# Altium PCB PCB1.PcbDoc
Units mm, origin at the board's own origin, x right, y up, seen from the top; angles counter-clockwise.
Board outline 54.61 x 26 mm, 4 copper layers (L1(Signal), L2(GND), L3(GND), L4(Signal)), stack 1.57 mm thick; 35 components, 22 nets, 125 pads, 38 vias.
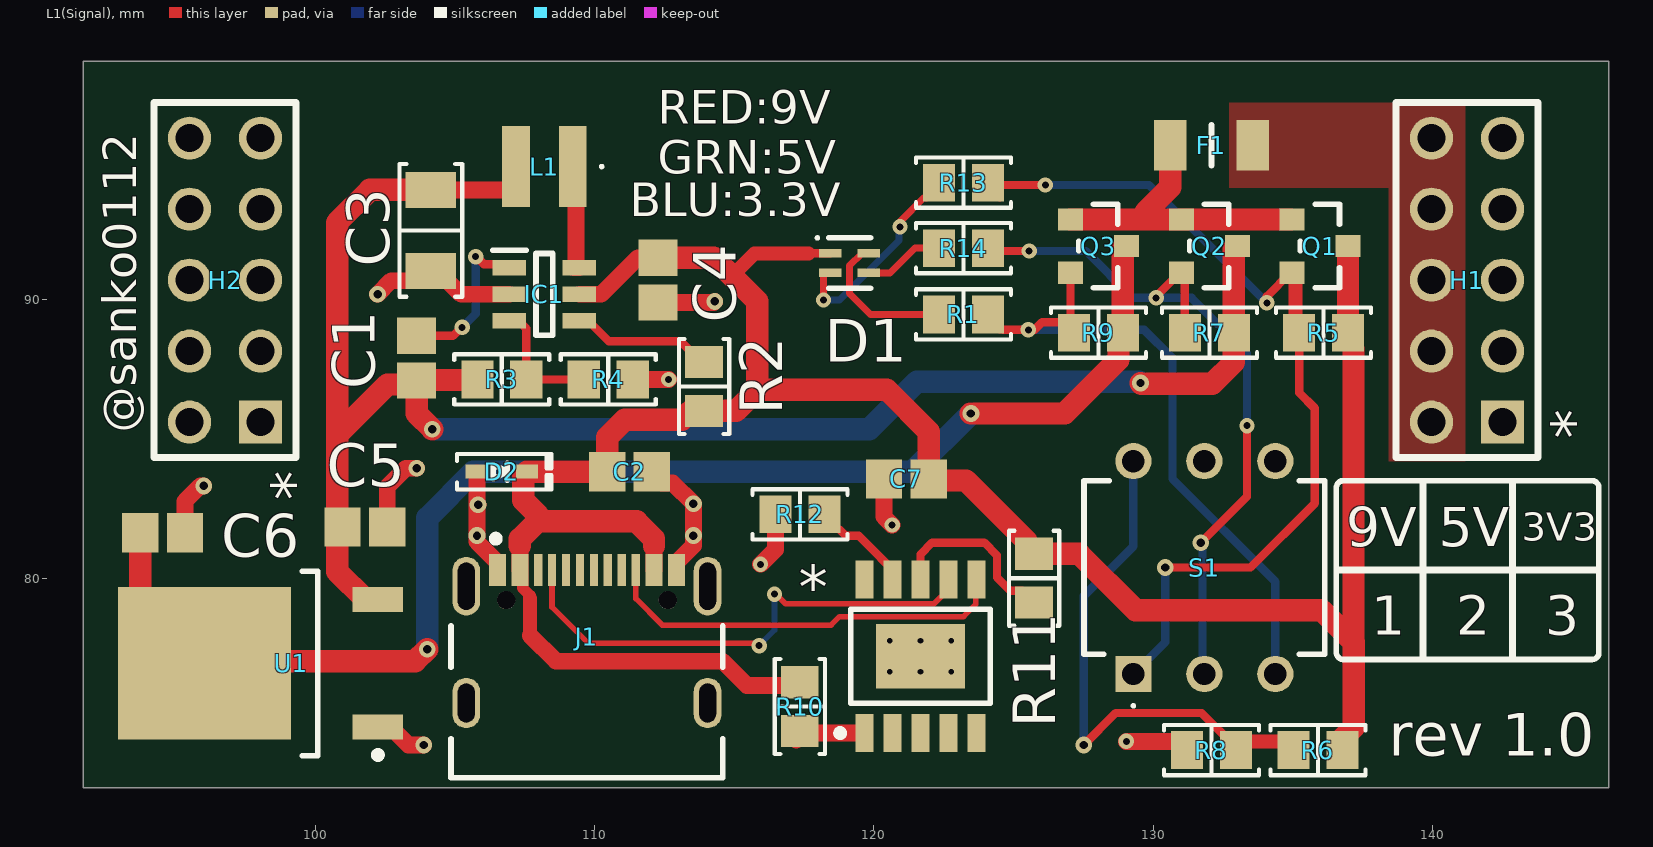
[diagram p0: L1(Signal) view]
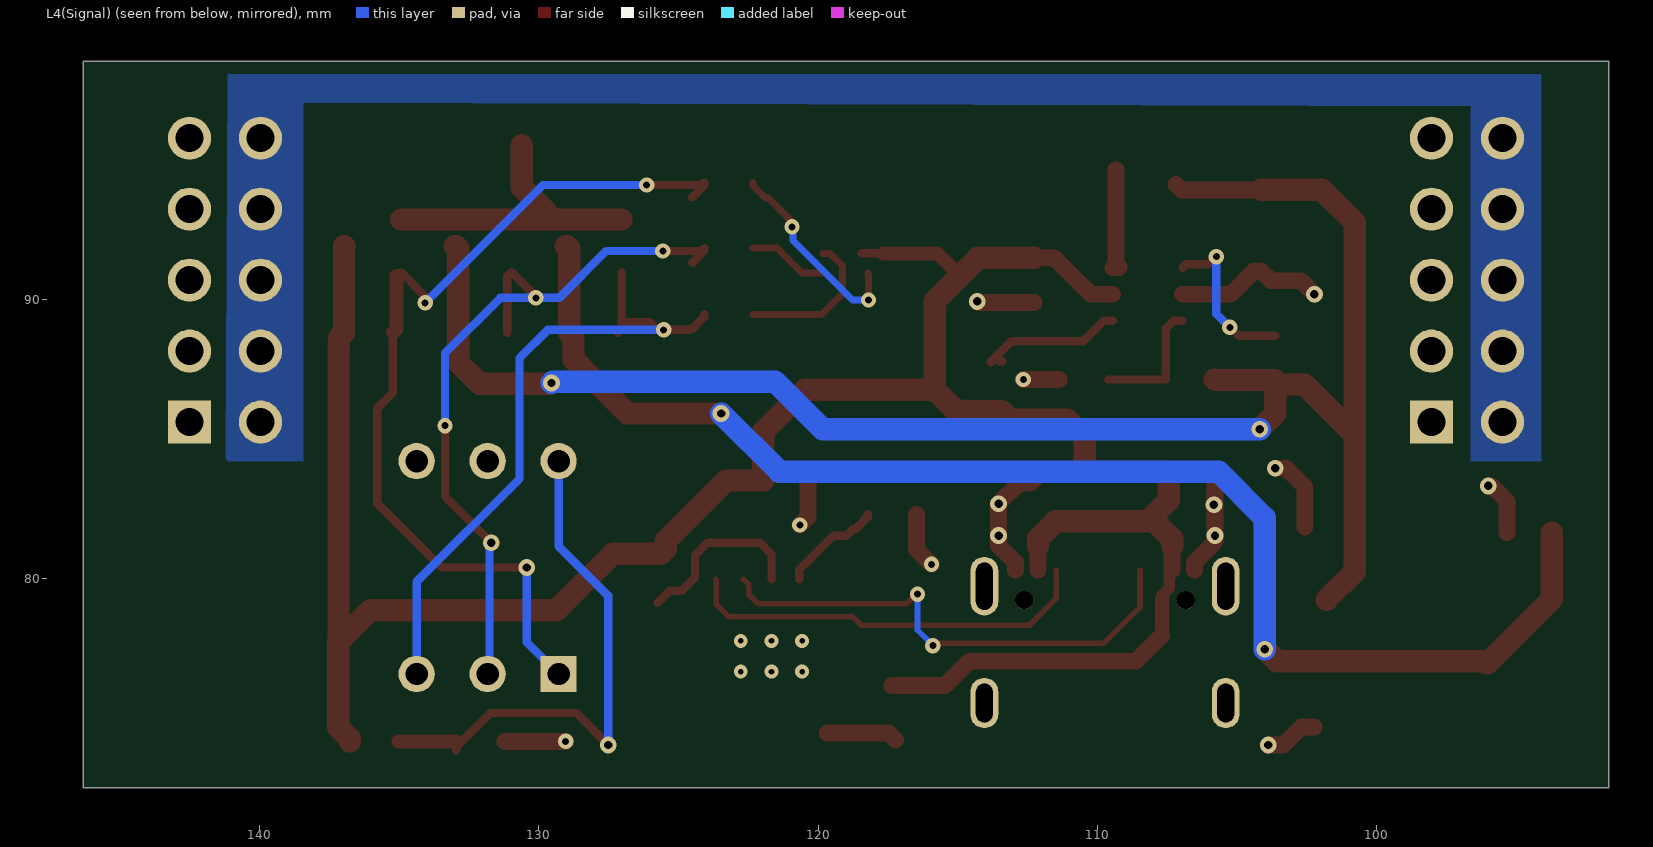
[diagram p1: L4(Signal) view, seen from below]
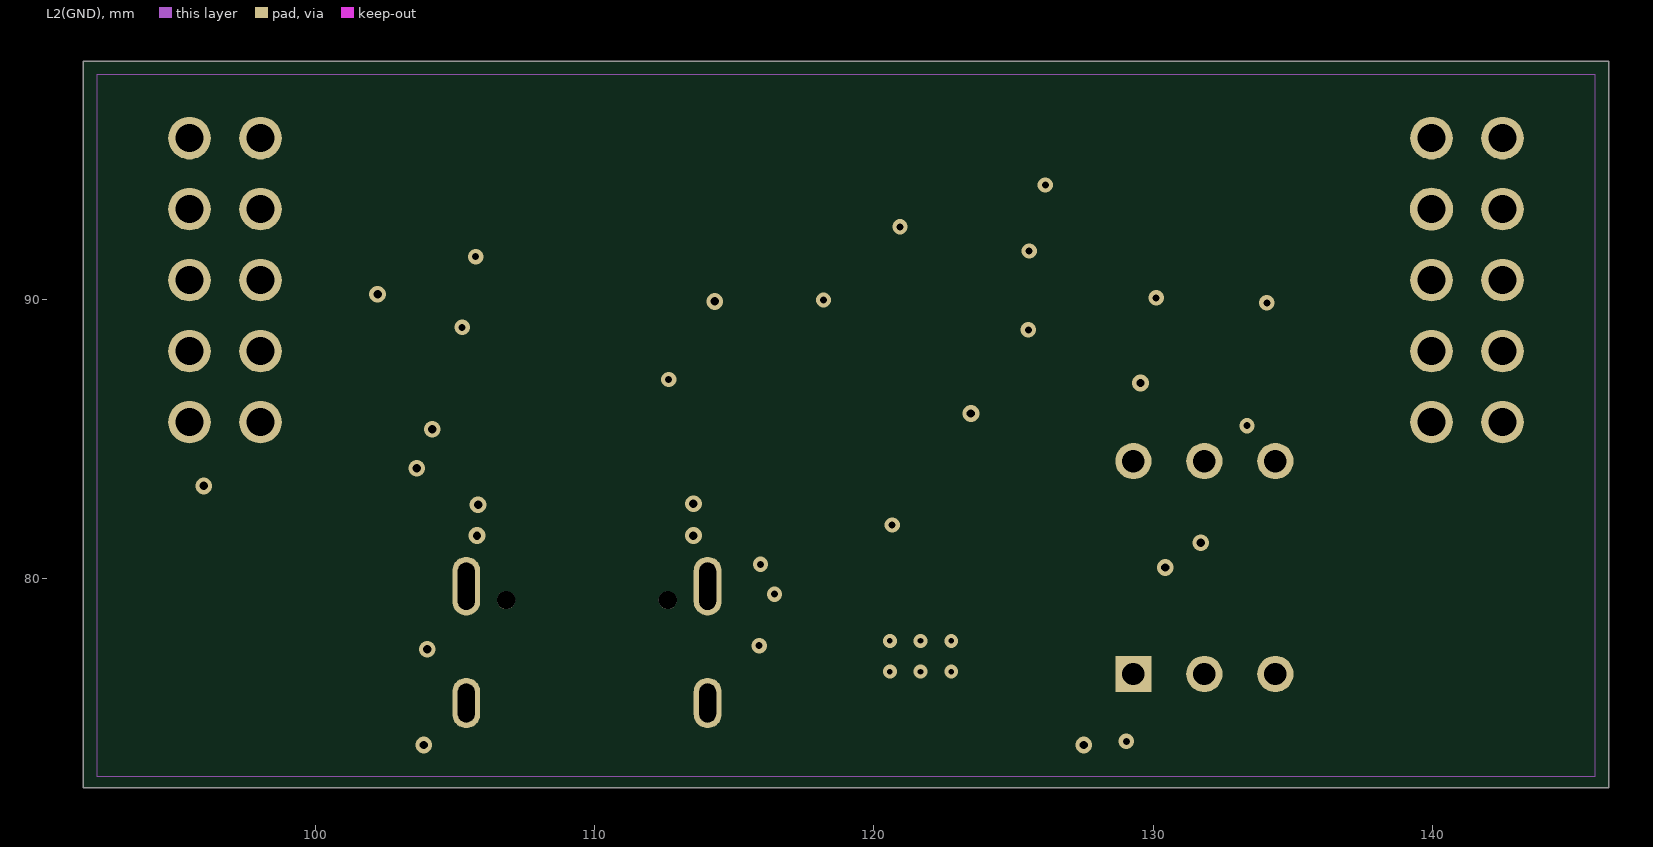
[diagram p2: L2(GND)]
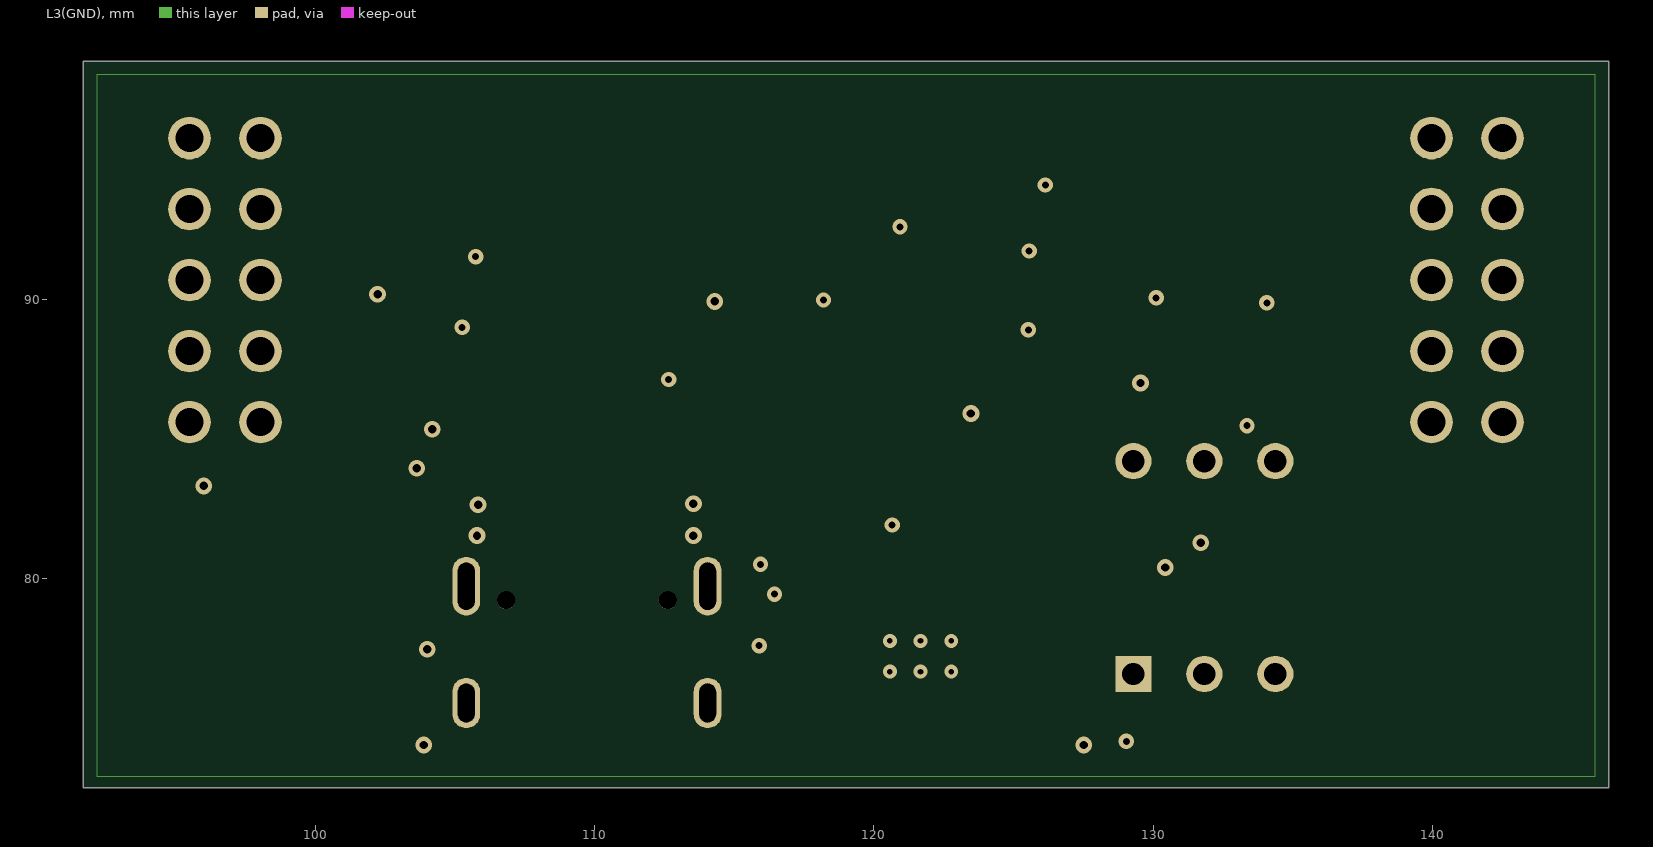
[diagram p3: L3(GND)]
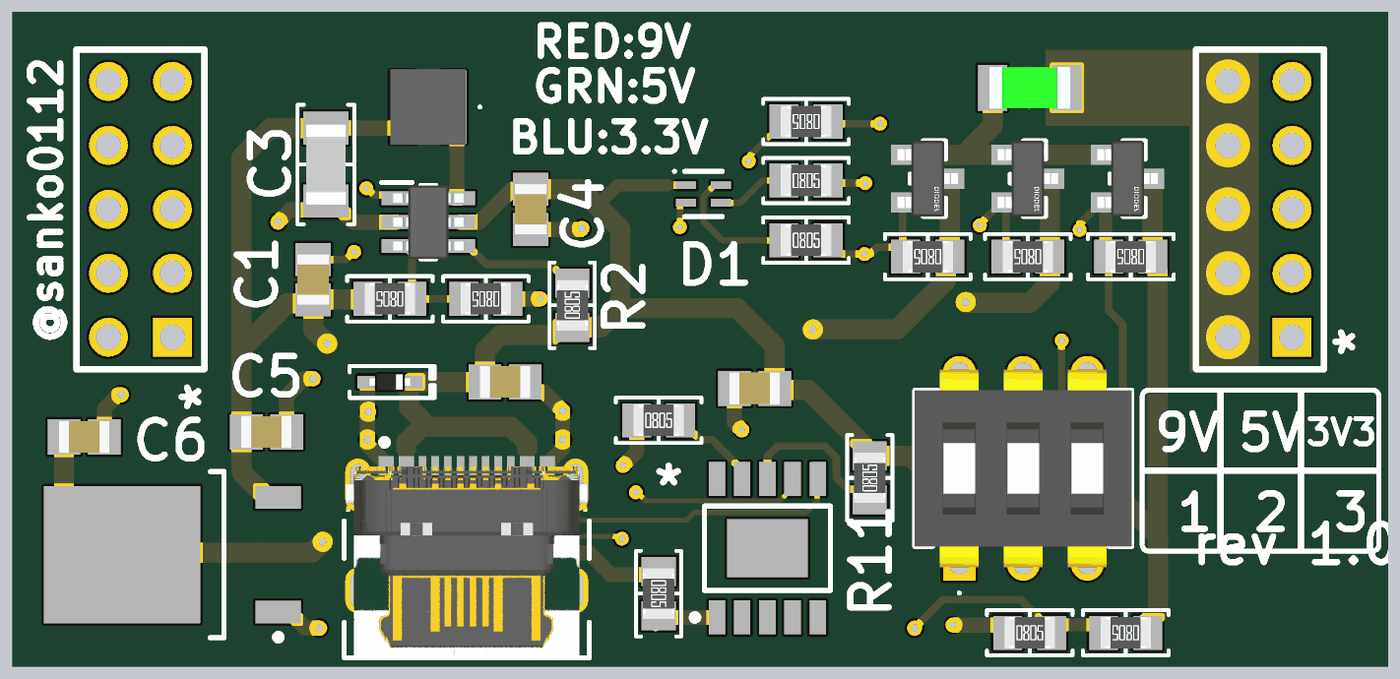
[diagram p4: 3D render of the assembled board from above, using the file's embedded part models]

## Layer stack, top to bottom
Top Mask: solder mask 0.015, Solder Resist, Dk 3.8
L1(Signal): signal copper 0.035
Dielectric 1: prepreg 0.2, 7628, Dk 4.6
L2(GND): signal copper 0.0175
Core: core 1.065, FR-4, Dk 4.5
L3(GND): signal copper 0.0175
Dielectric 2: prepreg 0.2, 7628, Dk 4.6
L4(Signal): signal copper 0.035
Bottom Mask: solder mask 0.015, Solder Resist, Dk 3.8

## Board outline
91.694,72.517 91.694,98.517 146.304,98.517 146.304,72.517

## Design rules (kind name [scope] priority, off if disabled: settings)
BoardOutlineClearance [All] p1: gap=0.22 ignorepadtopadclearanceinfootprint=FALSE
Clearance "Clearance Different Nets" [All] p1: gap=0.2 ignorepadtopadclearanceinfootprint=FALSE except(0.1: Arc-Arc Arc-Track Arc-SMDPad Track-Track Track-SMDPad; 0.127: SMDPad-SMDPad SMDPad-Via THPad-Via Via-Via; 0.254: Arc-Via Arc-Text Track-Via Track-Text SMDPad-Text THPad-Text Via-Text Fill-Text Poly-Text Region-Text Text-Text; 0.5: THPad-THPad Via-Hole)
Clearance "Clearance Same Nets" [All] p2: gap=0.2 ignorepadtopadclearanceinfootprint=FALSE except(0.089: SMDPad-SMDPad; 0.1: Arc-SMDPad Track-SMDPad; 0.127: SMDPad-Via THPad-Via; 0.25: Arc-Arc Arc-Track Track-Track; 0.254: Arc-Via Arc-Text Track-Via Track-Text SMDPad-Text THPad-Text Via-Via Via-Text Fill-Text Poly-Text Region-Text Text-Text)
Clearance "Clearance Bottom Layer" [OnLayer('Bottom Layer') vs InNet('No Net')] p3: gap=0.203 ignorepadtopadclearanceinfootprint=TRUE except(0.254: Arc-Text Track-Text SMDPad-Text THPad-Text Via-Text Fill-Text Poly-Text Region-Text Text-Text)
Clearance "Clearance Top Layer" [OnLayer('Top Layer')] p4: gap=0.203 ignorepadtopadclearanceinfootprint=TRUE except(0.254: Arc-Text Track-Text SMDPad-Text THPad-Text Via-Text Fill-Text Poly-Text Region-Text Text-Text)
HoleSize [All] p1: absolutevalues=TRUE maxlimit=6.3 minlimit=0.2 maxpercent=80.000 minpercent=20.000
MinimumAnnularRing [All] p1: minimumring=0.13
MinimumSolderMaskSliver [All] p1: minsoldermaskwidth=0.1
PolygonConnect PolygonConnect_1 [All] p1: connectstyle=Direct reliefconductorwidth=0.508 reliefentries=4 polygonreliefangle="90 Angle" airgapwidth=0.254
RoutingCorners [All] p1: cornerstyle=Round minsetback=2.54 maxsetback=2.54
RoutingVias [All] p1: holewidth=0.22 width=0.35 viastyle="Through Hole" minholewidth=0.2 minwidth=0.3 maxholewidth=1 maxwidth=2
SilkToSilkClearance [All] p1: silktosilkclearance=0.05
SilkToSolderMaskClearance [IsPad] p1: minsilkscreentomaskgap=0.05 clearancetoexposedcopper=TRUE
SolderMaskExpansion [All] p1: expansion=0.102 istentingtop=FALSE
SupplyNets "Schematic Supply Nets_3" [InNet('+3.3V')] p1: voltage=0.000
SupplyNets "Schematic Supply Nets_2" [InNet('+5V')] p2: voltage=0.000
SupplyNets "Schematic Supply Nets_1" [InNet('GND')] p3: voltage=0.000
SupplyNets "Schematic Supply Nets" [InNet('+9V')] p4: voltage=0.000
Width [All] p1: maxlimit=2.54 minlimit=0.1 preferedwidth=0.5 minimp=50.000000 maximp=50.000000 favimp=50.000000
25 further rules are at their usual default settings.

## Components (designator, comment, footprint, x,y, rotation, side; value= is the part's Value field where it differs from the comment)
* "CH224K" SOP100P600X180_HS-11N 121.666,77.216 r90 top
C1 "0.1 µF" "CAP 0805_2012" 103.632,87.884 r270 top
C2 "4.7 µF" "CAP 0805_2012" 111.252,83.82 r180 top
C3 "22 µF" "CAP 1206_3216 - 0.8MM" 104.14,92.456 r90 top
C4 "2.2 µF" "CAP 0805_2012" 112.268,90.678 r90 top
C5 "4.7 µF" "CAP 0805_2012" 101.778,81.839 r180 top
C6 "4.7 µF" "CAP 0805_2012" 94.539,81.636 r0 top
C7 "1 µF" "CAP 0805_2012" 121.158,83.566 r0 top
D1 "CLMUD-FKC-CH1NP1561BB7T4S3" SON70P150X100-4N 119.126,91.288 r0 top
D2 "PESD5V0S1UB,115" SOD523F 106.68,83.82 r0 top
F1 "SMD1206B075TF_16" FUSC3216X170N 132.08,95.504 r0 top
H1 "2x05 2.54 Pin Header" "2x05 2.54 Pin Header Horizontal -Footprint-1"#1 139.954,85.598 r90 top
H2 "2x05 2.54 Pin Header" "2x05 2.54 Pin Header Horizontal -Footprint-1"#2 95.504,85.598 r90 top
IC1 "DCP3601NMR" SOT95P280X125-6N 108.204,90.17 r0 top
J1 "USB4105-GF-A" FP-USB4105-GF-A-MFG 109.728,76.708 r0 top
L1 "XFL3012-153MEC" XFL3012153MEC 108.204,94.742 r180 top
Q1 "DMG2305UX-13" FP-SOT23-MFG 135.963,91.897 r0 top
Q2 "DMG2305UX-13" FP-SOT23-MFG 132.005,91.897 r0 top
Q3 "DMG2305UX-13" FP-SOT23-MFG 128.032,91.897 r0 top
R1 "1 kOhms" "RES 0805_2012" 123.201,89.451 r0 top
R2 "10 k" "RES 0805_2012" 113.919,86.868 r90 top
R3 "73.2k" "RES 0805_2012" 106.68,87.122 r180 top
R4 "15k" "RES 0805_2012" 110.49,87.122 r180 top
R5 "10 k" "RES 0805_2012" 136.093,88.798 r180 top
R6 "10 k" "RES 0805_2012" 135.89,73.858 r180 top
R7 "10 k" "RES 0805_2012" 132.005,88.798 r180 top
R8 "5.1 k" "RES 0805_2012" 132.08,73.858 r0 top
R9 "10 k" "RES 0805_2012" 128.032,88.798 r180 top
R10 "10 k" "RES 0805_2012" 117.348,75.413 r270 top
R11 "1 kOhms" "RES 0805_2012" 125.73,80.01 r90 top
R12 "6.8 kOhms" "RES 0805_2012" 117.348,82.296 r0 top
R13 "1 kOhms" "RES 0805_2012" 123.201,94.165 r180 top
R14 "1 kOhms" "RES 0805_2012" 123.201,91.821 r0 top
S1 "DS04-254-1L-03BK" DS042541L03BK 129.286,76.581 r0 top
U1 "LD1117DT33TR" TO-252_L 98.044,76.962 r180 top

## Footprints (in the part's own frame and the unit in brackets; to place one, negate y for a bottom-side part, rotate by r counter-clockwise, add the part's x,y. Pads: shape width x height; smd on the part's side, far side on the other; paste and mask are expansions set on the pad)
"2x05 2.54 Pin Header Horizontal -Footprint-1"#1 [mm]
  rect 1.54x1.54 / inner round 1.524 / far side rect 1.54x1.54 hole 1: 1(0,-2.54)
  round 1.54 / inner round 1.524 / far side round 1.54 hole 1: 2(2.54,-2.54) 3(5.08,-2.54) 4(7.62,-2.54) 5(10.16,-2.54) 6(10.16,0) 8(5.08,0) 9(2.54,0) 10(0,0)
  round 1.54 hole 1: 7(7.62,0)
  silkscreen extent -1.27,-3.81 11.43,1.27
"2x05 2.54 Pin Header Horizontal -Footprint-1"#2 [mm]
  rect 1.54x1.54 / inner round 1.524 / far side rect 1.54x1.54 hole 1: 1(0,-2.54)
  round 1.54 / inner round 1.524 / far side round 1.54 hole 1: 2(2.54,-2.54) 3(5.08,-2.54) 4(7.62,-2.54) 5(10.16,-2.54) 6(10.16,0) 7(7.62,0) 8(5.08,0) 9(2.54,0) 10(0,0)
  silkscreen extent -1.27,-3.81 11.43,1.27
"CAP 0805_2012" [mm] "Chip Capacitor, 2-Leads, Body 2.00x1.20mm, IPC Medium Density"
  rect 1.3x1.4 smd: 1(-0.8,0) 2(0.8,0)
  body extent -1,-0.64 1,0.64, height 1.26
"CAP 1206_3216 - 0.8MM" [mm] "Chip Capacitor, 2-Leads, Body 3.25x1.60mm, IPC Medium Density"
  rect 1.3x1.8 smd: 1(-1.45,0) 2(1.45,0)
  silkscreen extent -2.37,-1.12 2.37,1.12, body extent -1.6,-0.8 1.6,0.8, height 0.8
DS042541L03BK [mm]
  rect 1.3x1.3 hole 0.8: 1(0,0)
  round 1.3 hole 0.8: 2(2.54,0) 3(5.08,0) 4(5.08,7.62) 5(2.54,7.62) 6(0,7.62)
  silkscreen extent -1.77,-1.19 6.85,6.91, body extent -1.77,-0.13 6.85,7.74, height 4.49
FP-SOT23-MFG [mm]
  rect 0.9x0.8 smd paste+0 mask+0: 1(-1,0.95) 2(-1,-0.95) 3(1,0)
  silkscreen extent -0.7,-1.5 0.7,1.5, body extent -1.55,-1.6 1.55,1.6, height 0.25
FP-USB4105-GF-A-MFG [mm]
  rrect100% 1x2.1 hole 1.7 slot 0.6 at 0 deg paste-2539.97 mask+0: 1(-4.32,3.015) 2(4.32,3.015)
  rrect100% 1x1.8 hole 1.4 slot 0.6 at 0 deg paste-2539.97 mask+0: 3(-4.32,-1.165) 4(4.32,-1.165)
  rect 0.6x1.15 smd paste+0 mask+0: A1-B12(-3.2,3.59) A4-B9(-2.4,3.59) B1-A12(3.2,3.59) B4-A9(2.4,3.59)
  rect 0.3x1.15 smd paste+0 mask+0: A5(-1.25,3.59) A6(-0.25,3.59) A7(0.25,3.59) A8(1.25,3.59) B5(1.75,3.59) B6(0.75,3.59) B7(-0.75,3.59) B8(-1.75,3.59)
  round 0.65 hole 0.65 unplated paste-2539.97 mask+0: ""(-2.89,2.515) ""(2.89,2.515)
  silkscreen extent -4.86,-3.84 4.86,4.84, body extent -4.96,-3.94 4.96,4.27, height 0.25
FUSC3216X170N [mm]
  rect 1.16x1.82 smd: 1(-1.475,0) 2(1.475,0)
  silkscreen extent 0,-0.73 0,0.73, body extent -1.6,-0.82 1.6,0.82, height 1.7
"RES 0805_2012" [mm] "Chip Resistor, 2-Leads, Body 2.00x1.25mm, IPC Medium Density"
  rect 1.15x1.35 smd: 1(-0.875,0) 2(0.875,0)
  silkscreen extent -1.7,-0.9 1.7,0.9, body extent -1,-0.62 1,0.63, height 0.6
SOD523F [mm] "SODFL, 2-Leads, Body 0.80x1.60mm, IPC Medium Density"
  rect 0.8x0.5 smd: 1(-0.9,0) 2(0.9,0)
  silkscreen extent -1.6,-0.64 1.8,0.64, body extent -0.8,-0.4 0.8,0.4, height 0.65
SON70P150X100-4N [mm] "SON, 4-Leads, Body 1.50x1.50mm, Pitch 0.70mm, IPC Medium Density"
  rect 0.8x0.3 smd: 1(-0.69,0.35) 2(-0.69,-0.35) 3(0.69,-0.35) 4(0.69,0.35)
  silkscreen extent -1.2,-0.9 0.75,0.95, body extent -0.75,-0.75 0.75,0.75, height 1
SOP100P600X180_HS-11N [mm] "SOP, 10-Leads, Body 5.00x3.90mm, Pitch 1.00mm, Thermal Pad 3.20x2.30mm, IPC Medium Density"
  rect 2.3x3.2 smd: 0(0,0)
  rect 1.35x0.65 smd: 1(-2.75,2) 2(-2.75,1) 3(-2.75,0) 4(-2.75,-1) 5(-2.75,-2) 6(2.75,-2) 7(2.75,-1) 8(2.75,0) 9(2.75,1) 10(2.75,2)
  silkscreen extent -2.87,-2.5 1.67,3, body extent -1.95,-2.5 1.95,2.5, height 1.8
SOT95P280X125-6N [mm]
  rect 1.2x0.55 smd: 1(-1.25,0.95) 2(-1.25,0) 3(-1.25,-0.95) 4(1.25,-0.95) 5(1.25,0) 6(1.25,0.95)
  silkscreen extent -1.85,-1.46 0.3,1.58, body extent -1.4,-1.46 1.4,1.46, height 1.25
TO-252_L [mm] "D-PAK, 4-Leads, Body 6.1x6.5mm, Pitch 2.28mm, Lead Span 9.7mm, IPC High Density"
  rect 1.8x0.9 smd: 1(-4.2,2.28) 3(-4.2,-2.28)
  rect 6.2x5.45 smd: 4(2,0)
  silkscreen extent -4.33,-3.3 -1.5,3.4, body extent -2.05,-3.3 4.15,3.3, height 2.4
XFL3012153MEC [mm]
  rect 1x2.9 smd: 1(-1.015,0) 2(1.015,0)
  silkscreen extent -2.1,-0.05 -2,0.05, body extent -1.5,-1.5 1.5,1.5, height 1.4

## Part data
*: library part CMP-019-00049-3, "CH224 single chip integrates USB PD and other fast charging protocols, supports PD3.0/2.0, BC1.2 and other boost fast charging protocols, automatically"
C1: library part CC0805MRX7R9BB104, "CAP CER 0.1UF 50V X7R 0805", Device Package="0805 (2012 Metric)", manufacturer=Yageo, Operating Temperature="-55°C ~ 125°C", Supplier Part Number 1=311-4351-1-ND, Temperature Coefficient=X7R, Tolerance=±20%, Voltage - Rated=50V, Applications="General Purpose", Capacitance="0.1 µF", componentlink1description=Datasheet, componentlink1url=https://www.yageo.com/upload/media/product/productsearch/datasheet/mlcc/UPY-GPHC_X7R_6.3V-to-50V_18.pdf, componentlink2description="DigiKey Link", componentlink2url=https://www.digikey.com/en/products/detail/yageo/CC0805MRX7R9BB104/5884281, lastupdated="2/9/2024 8:16:09 PM", Lifecycle Status=Active, Minimum Order=1, Mounting Type="Surface Mount, MLCC", Package / Case="0805 (2012 Metric)", packaging=TapeAndReel, Part Number=CC0805MRX7R9BB104, Part Status=Active, partid=2475, price=0.01, series=CC, Size / Dimension="0.079\" L x 0.049\" W (2.00mm x 1.25mm)", Supplier 1=DigiKey, Thickness (Max)="0.037\" (0.95mm)"
C2 C5 C6: library part C0805X475J9RACAUTO, "CAP CER 4.7UF 6.3V X7R 0805", Device Package="0805 (2012 Metric)", manufacturer=KEMET, Operating Temperature="-55°C ~ 125°C", Ratings=AEC-Q200, Supplier Part Number 1=399-15727-1-ND, Temperature Coefficient=X7R, Tolerance=±5%, Voltage - Rated=6.3V, Applications="Automotive, Boardflex Sensitive", Capacitance="4.7 µF", componentlink1description=Datasheet, componentlink1url=https://api.kemet.com/component-edge/download/datasheet/C0805X475J9RACAUTO.pdf, componentlink2description="DigiKey Link", componentlink2url=https://www.digikey.com/en/products/detail/kemet/C0805X475J9RACAUTO/7427557, Features="Soft Termination", lastupdated="2/9/2024 8:16:08 PM", Lifecycle Status=Active, Minimum Order=1, Mounting Type="Surface Mount, MLCC", Package / Case="0805 (2012 Metric)", packaging=TapeAndReel, Part Number=C0805X475J9RACAUTO, Part Status=Active, partid=2889, price=0.20, series="SMD Auto X7R Flex", Size / Dimension="0.079\" L x 0.049\" W (2.00mm x 1.25mm)", Supplier 1=DigiKey, Thickness (Max)="0.057\" (1.45mm)"
C3: library part CL31A226MOCLNNC, "CAP CER 22UF 16V X5R 1206", Device Package="1206 (3216 Metric)", manufacturer="Samsung Electro-Mechanics", Operating Temperature="-55°C ~ 85°C", Supplier Part Number 1=1276-2728-1-ND, Temperature Coefficient=X5R, Tolerance=±20%, Voltage - Rated=16V, Applications="General Purpose", Capacitance="22 µF", componentlink1description=Datasheet, componentlink1url=http://www.samsungsem.com/kr/support/product-search/mlcc/CL31A226MOCLNNC.jsp, componentlink2description="DigiKey Link", componentlink2url=https://www.digikey.com/en/products/detail/samsung-electro-mechanics/CL31A226MOCLNNC/3888386, Features="Low Profile", lastupdated="6/4/2024 7:10:40 PM", Lifecycle Status=Active, Minimum Order=1, Mounting Type="Surface Mount, MLCC", Package / Case="1206 (3216 Metric)", packaging=TapeAndReel, Part Number=CL31A226MOCLNNC, Part Status=Active, partid=19106, price=0.04, series=CL, Size / Dimension="0.126\" L x 0.063\" W (3.20mm x 1.60mm)", Supplier 1=DigiKey, Thickness (Max)="0.037\" (0.95mm)"
C4: library part CL21A225KB9LNNC, "CAP CER 2.2UF 50V X5R 0805", Device Package="0805 (2012 Metric)", manufacturer="Samsung Electro-Mechanics", Operating Temperature="-55°C ~ 85°C", Supplier Part Number 1=1276-2409-1-ND, Temperature Coefficient=X5R, Tolerance=±10%, Voltage - Rated=50V, Applications="General Purpose", Capacitance="2.2 µF", componentlink1description=Datasheet, componentlink1url=http://www.samsungsem.com/kr/support/product-search/mlcc/CL21A225KB9LNNC.jsp, componentlink2description="DigiKey Link", componentlink2url=https://www.digikey.com/en/products/detail/samsung-electro-mechanics/CL21A225KB9LNNC/3888067, Features="Low Profile", lastupdated="2/9/2024 8:16:07 PM", Lifecycle Status=Active, Minimum Order=1, Mounting Type="Surface Mount, MLCC", Package / Case="0805 (2012 Metric)", packaging=TapeAndReel, Part Number=CL21A225KB9LNNC, Part Status=Active, partid=3097, price=0.04, series=CL, Size / Dimension="0.079\" L x 0.049\" W (2.00mm x 1.25mm)", Supplier 1=DigiKey, Thickness (Max)="0.039\" (1.00mm)"
C7: library part C2012X7R1H105K125AE, "CAP CER 1UF 50V X7R 0805", Device Package="0805 (2012 Metric)", manufacturer="TDK Corporation", Operating Temperature="-55°C ~ 125°C", Supplier Part Number 1=445-8890-1-ND, Temperature Coefficient=X7R, Tolerance=±10%, Voltage - Rated=50V, Applications="Boardflex Sensitive", Capacitance="1 µF", componentlink1description=Datasheet, componentlink1url=https://product.tdk.com/info/en/catalog/datasheets/mlcc_commercial_soft_en.pdf?ref_disty=digikey, componentlink2description="DigiKey Link", componentlink2url=https://www.digikey.com/en/products/detail/tdk-corporation/C2012X7R1H105K125AE/3283657, Features="Soft Termination", lastupdated="2/9/2024 8:16:07 PM", Lifecycle Status=Active, Minimum Order=1, Mounting Type="Surface Mount, MLCC", Package / Case="0805 (2012 Metric)", packaging=TapeAndReel, Part Number=C2012X7R1H105K125AE, Part Status=Active, partid=3116, price=0.09, series=C, Size / Dimension="0.080\" L x 0.050\" W (2.03mm x 1.27mm)", Supplier 1=DigiKey, Thickness (Max)="0.059\" (1.50mm)"
D1: library part CMP-007-00044-1, "Cree LED RGB LED Common Annode If=10mA Vf = 1.9/2.6/2.7"
D2: "TVS DIODE 5VWM 20VC SOD523", Capacitance @ Frequency="152pF @ 1MHz", Current - Peak Pulse (10/1000µs)="15A (8/20µs)", manufacturer="Nexperia USA Inc.", Operating Temperature="-65°C ~ 150°C (TA)", Package / Case="SC-79, SOD-523", Power - Peak Pulse=260W, Power Line Protection=No, Supplier Device Package=SOD-523, Supplier Part Number 1=1727-3839-1-ND, Voltage - Breakdown (Min)=6.4V, Voltage - Clamping (Max) @ Ipp=20V, Voltage - Reverse Standoff (Typ)="5V (Max)", Applications="General Purpose", componentlink1description=Datasheet, componentlink1url=https://assets.nexperia.com/documents/data-sheet/PESDXS1UB_SERIES.pdf, componentlink2description="DigiKey Link", componentlink2url=https://www.digikey.com/en/products/detail/nexperia-usa-inc/PESD5V0S1UB-115/1157466, lastupdated="6/3/2024 8:22:18 PM", Lifecycle Status=Active, Minimum Order=1, Mounting Type="Surface Mount", packaging=TapeAndReel, Part Number=PESD5V0S1UB,115, Part Status=Active, partid=9746, price=0.07, series=-, Supplier 1=DigiKey, Type=Zener, Unidirectional Channels=1
F1: "Fuse", Arrow Part Number=SMD1206B075TF/16, Manufacturer_Name=YAGEO, Mouser Part Number=603-SMD1206B075TF/16, Arrow Price/Stock=https://www.arrow.com/en/products/smd1206b075tf16/yageo?utm_currency=USD&region=europe, Datasheet Link=https://www.yageo.com/upload/media/product/productsearch/datasheet/cpc/pptc/SMD1206_1.pdf, Height=1.7mm, Manufacturer_Part_Number=SMD1206B075TF/16, Mouser Price/Stock=https://www.mouser.co.uk/ProductDetail/YAGEO/SMD1206B075TF-16?qs=PzGy0jfpSMs6BxWZGfvz0g%3D%3D
H1 H2: library part CMP-00030-00001-1, "2x05 2.54mm Pin Header Horizontal"
IC1: "Integrated Circuit", Manufacturer_Name=STMicroelectronics, Mouser Part Number=511-DCP3601NMR, Datasheet Link=https://www.st.com/resource/en/datasheet/dcp3601.pdf, Height=1.25mm, Manufacturer_Part_Number=DCP3601NMR, Mouser Price/Stock=https://www.mouser.co.uk/ProductDetail/STMicroelectronics/DCP3601NMR?qs=VVKQmw408U%252BduQkqjRfAvg%3D%3D
J1: library part CMP-002-00071-1, "Conn USB 2.0 Type C RCP 24 POS 0.3mm/0.5mm Solder RA SMD 24 Terminal 1 Port T/R"
L1: "Inductor", Manufacturer_Name=COILCRAFT, Mouser Part Number=994-XFL3012-153MEC, Datasheet Link=https://www.coilcraft.com/en-us/files/datasheet/xfl3012, Height=1.3mm, Manufacturer_Part_Number=XFL3012-153MEC, Mouser Price/Stock=https://www.mouser.co.uk/ProductDetail/Coilcraft/XFL3012-153MEC?qs=zCSbvcPd3pYzlT47BogAHw%3D%3D
Q1 Q2 Q3: library part CMP-013-00034-1, "Power Field-Effect Transistor, 4.2A I(D), 20V, 0.052ohm, 1-Element, P-Channel, Silicon, Metal-oxide Semiconductor FET", Max Operating Temperature=150°C, Pins=3, RoHS Compliant=Yes
R1 R13 R14: library part RNCS0805BKE1K00, "RES 1K OHM 0.1% 1/10W 0805", Device Package="0805 (2012 Metric)", manufacturer="Stackpole Electronics Inc", Operating Temperature="-55°C ~ 155°C", Power (Watts)="0.1W, 1/10W", Ratings=AEC-Q200, Supplier Device Package=0805, Supplier Part Number 1=RNCS0805BKE1K00CT-ND, Temperature Coefficient=±25ppm/°C, Tolerance=±0.1%, componentlink1description=Datasheet, componentlink1url=https://www.seielect.com/catalog/sei-rncs_rnch.pdf, componentlink2description="DigiKey Link", componentlink2url=https://www.digikey.com/en/products/detail/stackpole-electronics-inc/RNCS0805BKE1K00/1800073, Composition="Thin Film", Features="Anti-Corrosive, Automotive AEC-Q200, Moisture Resistant", Height - Seated (Max)="0.026\" (0.65mm)", lastupdated="2/8/2024 9:02:39 PM", Lifecycle Status=Active, Minimum Order=1, Number of Terminations=2, Package / Case="0805 (2012 Metric)", packaging=TapeAndReel, Part Number=RNCS0805BKE1K00, Part Status=Active, partid=27715, price=0.07, Resistance="1 kOhms", series=RNCS, Size / Dimension="0.079\" L x 0.049\" W (2.00mm x 1.25mm)", Supplier 1=DigiKey
R2 R5 R6 R7 R9 R10: library part RNCS0805BKE10K0, "RES 10K OHM 0.1% 1/10W 0805", Device Package="0805 (2012 Metric)", manufacturer="Stackpole Electronics Inc", Operating Temperature="-55°C ~ 155°C", Power (Watts)="0.1W, 1/10W", Ratings=AEC-Q200, Resistance="10 kOhms", Supplier Device Package=0805, Supplier Part Number 1=RNCS0805BKE10K0CT-ND, Temperature Coefficient=±25ppm/°C, Tolerance=±0.1%, componentlink1description=Datasheet, componentlink1url=https://www.seielect.com/catalog/sei-rncs_rnch.pdf, componentlink2description="DigiKey Link", componentlink2url=https://www.digikey.com/en/products/detail/stackpole-electronics-inc/RNCS0805BKE10K0/1800067, Composition="Thin Film", Features="Anti-Corrosive, Automotive AEC-Q200, Moisture Resistant", Height - Seated (Max)="0.026\" (0.65mm)", lastupdated="2/8/2024 9:02:39 PM", Lifecycle Status=Active, Minimum Order=1, Number of Terminations=2, Package / Case="0805 (2012 Metric)", packaging=TapeAndReel, Part Number=RNCS0805BKE10K0, Part Status=Active, partid=27713, price=0.07, series=RNCS, Size / Dimension="0.079\" L x 0.049\" W (2.00mm x 1.25mm)", Supplier 1=DigiKey
R3: library part CRCW080573K2FKEA, "RES SMD 73.2K OHM 1% 1/8W 0805", Device Package="0805 (2012 Metric)", manufacturer="Vishay Dale", Operating Temperature="-55°C ~ 155°C", Power (Watts)="0.125W, 1/8W", Ratings=AEC-Q200, Resistance="73.2 kOhms", Supplier Device Package=0805, Supplier Part Number 1=541-73.2KCCT-ND, Temperature Coefficient=±100ppm/°C, Tolerance=±1%, componentlink1description=Datasheet, componentlink1url=http://www.vishay.com/docs/20035/dcrcwe3.pdf, componentlink2description="DigiKey Link", componentlink2url=https://www.digikey.com/en/products/detail/vishay-dale/CRCW080573K2FKEA/1175850, Composition="Thick Film", Features="Automotive AEC-Q200", Height - Seated (Max)="0.020\" (0.50mm)", lastupdated="2/8/2024 9:02:35 PM", Lifecycle Status=Active, Minimum Order=1, Number of Terminations=2, Package / Case="0805 (2012 Metric)", packaging=TapeAndReel, Part Number=CRCW080573K2FKEA, Part Status=Active, partid=28591, price=0.01, series=CRCW, Size / Dimension="0.079\" L x 0.049\" W (2.00mm x 1.25mm)", Supplier 1=DigiKey
R4: library part CRGP0805F15K, "RES 15K OHM 1% 1/3W 0805", Device Package="0805 (2012 Metric)", manufacturer="TE Connectivity Passive Product", Operating Temperature="-55°C ~ 155°C", Power (Watts)="0.333W, 1/3W", Resistance="15 kOhms", Supplier Device Package=0805, Supplier Part Number 1=A130491CT-ND, Temperature Coefficient=±100ppm/°C, Tolerance=±1%, componentlink1description=Datasheet, componentlink1url=https://www.te.com/commerce/DocumentDelivery/DDEController?Action=srchrtrv&DocNm=9-1773463-9&DocType=DS&DocLang=English, componentlink2description="DigiKey Link", componentlink2url=https://www.digikey.com/en/products/detail/te-connectivity-passive-product/CRGP0805F15K/8577093, Composition="Thick Film", Features="Pulse Withstanding", Height - Seated (Max)="0.026\" (0.65mm)", lastupdated="2/8/2024 9:02:34 PM", Lifecycle Status=Active, Minimum Order=1, Number of Terminations=2, Package / Case="0805 (2012 Metric)", packaging=TapeAndReel, Part Number=CRGP0805F15K, Part Status=Active, partid=28775, price=0.02, series=CRGP, Size / Dimension="0.079\" L x 0.049\" W (2.00mm x 1.25mm)", Supplier 1=DigiKey
R8: library part RTAN0805BKE5K10, "RES 5.1K OHM 0.1% 1/5W 0805", Device Package="0805 (2012 Metric)", manufacturer="Stackpole Electronics Inc", Operating Temperature="-55°C ~ 155°C", Power (Watts)="0.2W, 1/5W", Ratings=AEC-Q200, Resistance="5.1 kOhms", Supplier Device Package=0805, Supplier Part Number 1=738-RTAN0805BKE5K10CT-ND, Temperature Coefficient=±25ppm/°C, Tolerance=±0.1%, componentlink1description=Datasheet, componentlink1url=https://www.seielect.com/catalog/sei-rtan.pdf, componentlink2description="DigiKey Link", componentlink2url=https://www.digikey.com/en/products/detail/stackpole-electronics-inc/RTAN0805BKE5K10/6602187, Composition="Thin Film", Features="Anti-Sulfur, Automotive AEC-Q200, Moisture Resistant", Height - Seated (Max)="0.026\" (0.65mm)", lastupdated="2/8/2024 9:02:20 PM", Lifecycle Status=Active, Minimum Order=1, Number of Terminations=2, Package / Case="0805 (2012 Metric)", packaging=TapeAndReel, Part Number=RTAN0805BKE5K10, Part Status=Active, partid=31948, price=0.15, series=RTAN, Size / Dimension="0.079\" L x 0.049\" W (2.00mm x 1.25mm)", Supplier 1=DigiKey
R11: library part CPF0805B1K0E, "RES SMD 1K OHM 0.1% 1/10W 0805", Device Package="0805 (2012 Metric)", manufacturer="TE Connectivity Passive Product", Operating Temperature="-55°C ~ 155°C", Power (Watts)="0.1W, 1/10W", Supplier Device Package=0805, Supplier Part Number 1=A106044CT-ND, Temperature Coefficient=±25ppm/°C, Tolerance=±0.1%, componentlink1description=Datasheet, componentlink1url=https://www.te.com/commerce/DocumentDelivery/DDEController?Action=srchrtrv&DocNm=1773200&DocType=DS&DocLang=English, componentlink2description="DigiKey Link", componentlink2url=https://www.digikey.com/en/products/detail/te-connectivity-passive-product/CPF0805B1K0E/2390399, Composition="Thin Film", Height - Seated (Max)="0.026\" (0.65mm)", lastupdated="2/8/2024 9:02:39 PM", Lifecycle Status=Active, Minimum Order=1, Number of Terminations=2, Package / Case="0805 (2012 Metric)", packaging=TapeAndReel, Part Number=CPF0805B1K0E, Part Status=Active, partid=27725, price=0.09, Resistance="1 kOhms", series="CPF, Neohm", Size / Dimension="0.079\" L x 0.049\" W (2.00mm x 1.25mm)", Supplier 1=DigiKey
R12: library part CR0805-JW-682ELF, "RES SMD 6.8K OHM 5% 1/8W 0805", Device Package="0805 (2012 Metric)", manufacturer="Bourns Inc.", Operating Temperature="-55°C ~ 155°C", Power (Watts)="0.125W, 1/8W", Supplier Device Package=0805, Supplier Part Number 1=118-CR0805-JW-682ELFCT-ND, Temperature Coefficient=±200ppm/°C, Tolerance=±5%, componentlink1description=Datasheet, componentlink1url=https://www.bourns.com/docs/Product-Datasheets/CHPREZTR.pdf, componentlink2description="DigiKey Link", componentlink2url=https://www.digikey.com/en/products/detail/bourns-inc/CR0805-JW-682ELF/3785357, Composition="Thick Film", Features="Moisture Resistant", Height - Seated (Max)="0.024\" (0.60mm)", lastupdated="2/8/2024 9:02:38 PM", Lifecycle Status=Active, Minimum Order=1, Number of Terminations=2, Package / Case="0805 (2012 Metric)", packaging=TapeAndReel, Part Number=CR0805-JW-682ELF, Part Status=Active, partid=27886, price=0.01, Resistance="6.8 kOhms", series=CR0805, Size / Dimension="0.079\" L x 0.049\" W (2.00mm x 1.25mm)", Supplier 1=DigiKey
S1: "Switch", Manufacturer_Name="Same Sky", Mouser Part Number=490-DS04-254-1L-03BK, Datasheet Link=https://www.sameskydevices.com/product/resource/ds04-254.pdf, Height=4.51mm, Manufacturer_Part_Number=DS04-254-1L-03BK, Mouser Price/Stock=https://www.mouser.co.uk/ProductDetail/CUI-Devices/DS04-254-1L-03BK?qs=wnTfsH77Xs7MGlxBqw7mAg%3D%3D
U1: library part CMP-019-00053-1, "Fixed Positive LDO Regulator, 3.3V, 1.2V Dropout, BIPolar, PSSO2", Case/Package=TO-252, Max Supply Voltage=15V, Pins=2, RoHS Compliant=Yes

## Via types
v1: diameter 0.55, hole 0.25, L1(Signal) to L4(Signal), 16 vias
v2: diameter 0.6, hole 0.3, L1(Signal) to L4(Signal), 16 vias
v3: diameter 0.5, hole 0.2, L1(Signal) to L4(Signal), 6 vias

## Nets (pads, with @x,y where several pads share a name; then routed paths per layer and width w, separated by ;. In a path a pad name is that pad's centre, name@x,y a point inside that pad or via, vN(x,y) a via of type N, cw(c..) or ccw(c..) an arc to the next point about the centre after c; other vN are vias at no path point)
+3.3V: C6.1 Q3.3 R9.1 U1.4 | length 49.7
  L1(Signal) w0.8: C6.1 93.739,79.267 U1.4 ; U1.4@96.12,77.038 103.581,77.038 v2(104.013,77.47) ; v2(123.469,85.903) 126.822,85.903 128.753,87.833 128.753,88.644 R9.1 128.907,91.822 128.982,91.897 Q3.3
  L4(Signal) w0.8: v2(104.013,77.47) 104.013,82.169 105.664,83.82 121.387,83.82 v2(123.469,85.903)
+5V: C1.2 C3.2 C5.2 L1.2 Q2.3 R3.2 R7.1 U1.3 | length 62.7
  L1(Signal) w0.6: C3.2 106.989,93.906 L1.2@107.189,94.106
  L1(Signal) w0.8: U1.3@101.794,79.242 100.787,80.249 100.787,81.839 100.787,85.141 ; C3.2 101.958,93.906 100.787,92.735 100.787,85.141 ; v2(104.191,85.344) 103.632,85.903 C1.2 ; R3.2 105.786,87.103 103.651,87.103 C1.2 ; v2(129.54,86.995) 129.565,86.97 132.112,86.97 132.88,87.737 R7.1 132.88,91.822 132.955,91.897 Q2.3 ; 100.787,85.141 102.59,86.943 103.491,86.943 C1.2
  L4(Signal) w0.8: v2(104.191,85.344) 119.837,85.344 121.539,87.046 129.489,87.046 v2(129.54,86.995)
+9V: C2.2 C4.2 C7.2 D1.1 D2.2 IC1.5 J1.A4-B9 J1.B4-A9 Q1.3 R2.1 R5.1 R6.1 R10.1 R11.2 | length 91.3
  L1(Signal) w0.3: 117.8,91.638 D1.1
  L1(Signal) w0.4: J1.A4-B9 107.428,80.198 107.428,79.658 107.696,79.39 107.696,79.286
  L1(Signal) w0.5: 107.696,77.956 107.696,79.286 ; 114.916,90.824 115.73,91.638 117.658,91.638
  L1(Signal) w0.6: J1.A4-B9 107.328,81.166 ; 107.696,77.956 108.614,77.038 114.579,77.038 115.452,76.165 R10.1@117.353,76.165 ; IC1.5 110.236,90.17 111.544,91.478 C4.2 ; J1.B4-A9 112.128,81.166
  L1(Signal) w0.8: 107.328,81.166 107.328,81.42 107.95,82.042 ; 112.128,81.166 112.128,81.42 111.506,82.042 107.95,82.042 ; C4.2 114.262,91.478 114.916,90.824 115.824,89.916 115.824,86.755 ; C7.2 121.958,85.255 120.458,86.755 115.824,86.755 ; C7.2@121.966,83.508 123.293,83.508 125.455,81.346 125.455,81.06 R11.2@125.63,80.885 ; R11.2@125.83,80.885 R11.2 127.344,80.885 129.362,78.867 136.017,78.867 137.16,77.724 137.16,88.216 137.143,88.233 137.143,88.623 R5.1 136.968,91.897 Q1.3 ; R6.1@136.765,74.168 136.765,74.268 137.174,74.677 137.174,77.724 ; 107.95,82.042 107.95,82.296 107.442,82.804 107.442,83.682 D2.2 C2.2 110.452,85.052 111.083,85.683 113.128,85.683 113.438,85.993 R2.1 114.695,85.993 114.704,86.002 114.713,85.993 115.062,85.993 115.824,86.755
Blue_C: Q3.2 R1.2 R9.2 S1.3 | length 24.5
  L1(Signal) w0.3: R1.2 124.076,89.351 124.501,88.926 124.601,88.926 124.627,88.9 v1(125.523,88.9) 125.749,88.9 126.022,89.173 126.783,89.173 R9.2@127.032,88.923 ; Q3.2 R9.2@127.032,88.923 ; R9.2 R9.2@127.032,88.923
  L4(Signal) w0.3: v1(125.523,88.9) 129.667,88.9 130.683,87.884 130.683,83.566 134.366,79.883 S1.3@134.366,76.129
CC1: *.7 J1.A5 | length 18.3
  L1(Signal) w0.2: J1.A5 108.478,78.974 109.767,77.685 115.661,77.685 115.71,77.636 115.851,77.636 v1(115.89,77.597) ; v1(116.441,79.437) 116.495,79.437 116.841,79.091 122.141,79.091 122.485,79.435 122.485,79.785 *.7
  L4(Signal) w0.2: v1(115.89,77.597) 116.441,78.149 v1(116.441,79.437)
CC2: *.6 J1.B5 | length 14.8
  L1(Signal) w0.2: J1.B5 111.478,79.276 112.422,78.332 118.464,78.332 118.769,78.637 123.203,78.637 123.64,79.073 123.64,79.94 *.6
GND: *.0 C2.1 C3.1 C4.1 C5.1 C6.2 C7.1 D2.1 H1.1 H1.2 H1.3 H1.4 H1.5 H2.1 H2.2 H2.3 H2.4 H2.5 IC1.2 J1.1 J1.2 J1.3 J1.4 J1.A1-B12 J1.B1-A12 R4.1 R8.1 R12.1 S1.4 S1.5 U1.1 | length 29.6
  L1(Signal) w0.6: C6.2 95.339,82.766 95.885,83.312 v2(96.012,83.312) ; v2(102.235,90.17) 102.721,90.656 103.79,90.656 C3.1 ; U1.1@102.25,74.676 U1.1 102.694,74.682 103.335,74.041 v2(103.886,74.041) ; C5.1 102.578,83.274 103.251,83.947 v2(103.632,83.947) ; C3.1@104.39,91.006 105.226,90.17 IC1.2 ; D2.1@105.791,83.77 105.791,82.677 v2(105.831,82.637) 105.791,82.598 105.791,81.31 106.528,80.573 J1.A1-B12 ; R4.1 v1(112.649,87.122) ; C2.1 112.052,83.77 112.402,83.42 112.795,83.42 v2(113.538,82.677) 113.538,81.183 112.928,80.573 J1.B1-A12 ; C4.1 114.262,89.878 v2(114.3,89.916) ; v1(115.94,80.507) 116.473,81.04 R12.1 ; C7.1 120.358,82.207 v1(120.65,81.915) ; v1(129.032,74.168) R8.1@131.205,74.168
  other v2: 105.791,81.534 113.538,81.534
  other v3: 120.566,76.666 121.666,76.666 122.766,76.666 120.566,77.766 121.666,77.766 122.766,77.766
GREEN_C: Q2.2 R7.2 R14.2 S1.2 | length 26.9
  L1(Signal) w0.3: R14.2 124.076,91.721 R14.2@124.501,91.296 ; R14.2@124.078,91.719 v1(125.552,91.719) ; v1(130.099,90.041) 130.118,90.06 130.118,90.11 130.955,90.947 Q2.2 ; R7.2 Q2.2@131.13,90.822 ; v2(131.699,81.28) 133.35,82.931 v1(133.35,85.471)
  L4(Signal) w0.3: v1(125.552,91.719) 127.584,91.719 129.262,90.041 v1(130.099,90.041) 131.37,90.041 133.35,88.062 v1(133.35,85.471) ; v2(131.699,81.28) 131.756,81.223 S1.2@131.756,76.651
Net*_1: *.1 R10.2 | length 2.5
  L1(Signal) w0.6: R10.2@117.221,74.221 117.466,74.466 *.1
Net*_8: *.8 R11.1 | length 6.5
  L1(Signal) w0.3: *.8 121.666,80.865 122.081,81.28 123.952,81.28 124.404,80.828 124.404,80.033 124.883,79.554 125.311,79.554 R11.1
Net*_9: *.9 R12.2 | length 4.4
  L1(Signal) w0.3: R12.2@118.648,81.788 118.223,82.213 R12.2 118.223,82.196 118.648,81.771 118.748,81.771 118.985,81.534 119.452,81.534 120.241,80.745 120.241,80.741 120.666,80.316 *.9
NetC1_1: C1.1 IC1.1 | length 5.9
  L1(Signal) w0.3: C1.1 104.929,88.684 105.232,88.987 v1(105.259,88.987) ; v1(105.743,91.515) 105.77,91.515 106.039,91.245 106.829,91.245 IC1.1
  L4(Signal) w0.3: v1(105.259,88.987) 105.743,89.47 v1(105.743,91.515)
NetD1_2: D1.2 R13.2 | length 7.3
  L1(Signal) w0.25: v1(118.191,89.967) 118.191,90.913 D1.2@118.216,90.938 ; v1(120.929,92.583) 120.958,92.612 120.958,92.797 121.776,93.615 121.876,93.615 122.326,94.065 R13.2
  L4(Signal) w0.25: v1(118.191,89.967) 118.77,89.967 120.901,92.097 120.901,92.554 v1(120.929,92.583)
NetD1_3: D1.3 R14.1 | length 2.9
  L1(Signal) w0.25: D1.3 120.579,90.938 121.463,91.821 R14.1
NetD1_4: D1.4 R1.1 | length 5.4
  L1(Signal) w0.25: D1.4 119.566,91.638 119.126,91.198 119.126,90.195 119.871,89.451 R1.1
NetF1_1: F1.1 Q1.1 Q2.1 Q3.1 | length 10.9
  L1(Signal) w0.8: Q3.1 129.718,92.847 ; F1.1 130.605,94.005 129.718,93.117 129.718,92.847 ; Q1.1@134.913,92.847 130.955,92.847 129.718,92.847
NetIC1_3: IC1.3 R3.1 R4.2 | length 4.6
  L1(Signal) w0.3: IC1.3 107.279,89.22 107.555,88.944 R3.1 R4.2
NetIC1_4: IC1.4 R2.2 | length 5.1
  L1(Signal) w0.3: IC1.4 109.779,89.22 110.505,88.494 113.068,88.494 R2.2@113.819,87.743 ; R2.2@113.413,87.768 R2.2@113.538,87.768
NetIC1_6: IC1.6 L1.1 | length 3.8
  L1(Signal) w0.6: L1.1@109.336,94.624 109.336,91.145 109.219,91.145 109.244,91.12 IC1.6
NetR6_2: R6.2 R8.2 S1.6 | length 19.5
  L1(Signal) w0.3: v2(127.508,74.041) 128.651,75.184 131.729,75.184 132.955,73.958 R8.2
  L1(Signal) w0.5: R8.2@132.955,74.168 R6.2@135.015,74.168
  L4(Signal) w0.3: v2(127.508,74.041) 127.508,79.375 129.286,81.153 S1.6
RED_C: Q1.2 R5.2 R13.1 S1.1 | length 32.9
  L1(Signal) w0.3: R13.1@124.501,93.64 124.076,94.065 R13.1 124.16,94.082 v1(126.136,94.082) ; v2(130.429,80.391) 133.477,80.391 135.776,82.69 135.776,86.093 135.218,86.651 R5.2 ; v1(134.061,89.865) 134.061,90.096 134.913,90.947 Q1.2
  L1(Signal) w0.5: Q1.2@135.091,90.82 135.091,88.926 R5.2
  L4(Signal) w0.3: v1(126.136,94.082) 129.845,94.082 v1(134.061,89.865) ; S1.1 130.429,77.724 v2(130.429,80.391)
V_OUT: F1.2 H1.6 H1.7 H1.8 H1.9 H1.10 H2.6 H2.7 H2.8 H2.9 H2.10
pads on no net: *.2 *.3 *.4 *.5 *.10 J1. J1.A6 J1.A7 J1.A8 J1.B6 J1.B7 J1.B8

## Polygon pours and split planes (outlines as drawn)
V_OUT on L4(Signal) "V_OUT_L04_P002" (solid, pour order 2): 96.647,96.901 96.647,84.201 94.107,84.201 94.107,98.044 141.201,98.044 141.101,98.048 141.134,98.048 141.201,84.224 141.224,84.201 138.43,84.201 138.43,97.028 138.303,97.028 96.52,96.901
V_OUT on L1(Signal) "V_OUT_L01_P000" (solid, pour order 0): 134.747,97.028 135.001,97.028 140.97,97.028 141.171,97.229 141.171,84.201 138.43,84.201 138.43,93.98 135.001,93.98 132.715,93.98 132.715,94.361 132.715,97.028
GND on L3(GND) "NONET_L03_P004" (solid, shelved, pour order 4): 92.202,98.044 145.796,98.044 145.796,72.898 92.202,72.898
GND on L2(GND) "NONET_L02_P003" (solid, shelved, pour order 3): 92.202,98.044 145.796,98.044 145.796,72.898 92.202,72.898

## Silkscreen, mask and mechanical layers (free items; w line width, h text height)
Top Overlay:
  lines w0.2: 136.546,77.354 ccw(c136.8,77.354) 136.8,77.1 145.692,77.1 ccw(c145.692,77.354) 145.946,77.354 145.946,83.246 ccw(c145.692,83.246) 145.692,83.5 136.8,83.5 ccw(c136.8,83.246) 136.546,83.246 136.546,77.354
  lines w0.254: 136.586,80.3 145.86,80.3 ; 139.65,77.15 139.65,83.425 ; 142.85,77.15 142.85,83.425
  text "RED:9V" at 112.268,96.266 h1.2
  text "GRN:5V" at 112.268,94.488 h1.2
  text "BLU:3.3V" at 111.252,92.964 h1.2
  text "@sanko0112" at 93.599,85.217 h1.2 r90
  text "3V3" at 143.175,81.353 h1
  text "9V" at 136.906,81.153 h1.4
  text "5V" at 140.208,81.153 h1.4
  text "1" at 137.795,77.978 h1.4
  text "2" at 140.843,77.978 h1.4
  text "3" at 144.018,77.978 h1.4
  text "rev 1.0" at 138.43,73.66 h1.52
Mechanical 1:
  the board outline again, w0.254

## Text inside footprints (layer, text, board x,y; h text height)
H1: Top Overlay "*" at 145.762,84.992 h1.52 r90
H2: Top Overlay "*" at 99.949,82.804 h1.52 r90